# EAGLE board explorator_breakout_pcb_40mm_v2_pannel (EAGLE 9.6.2)
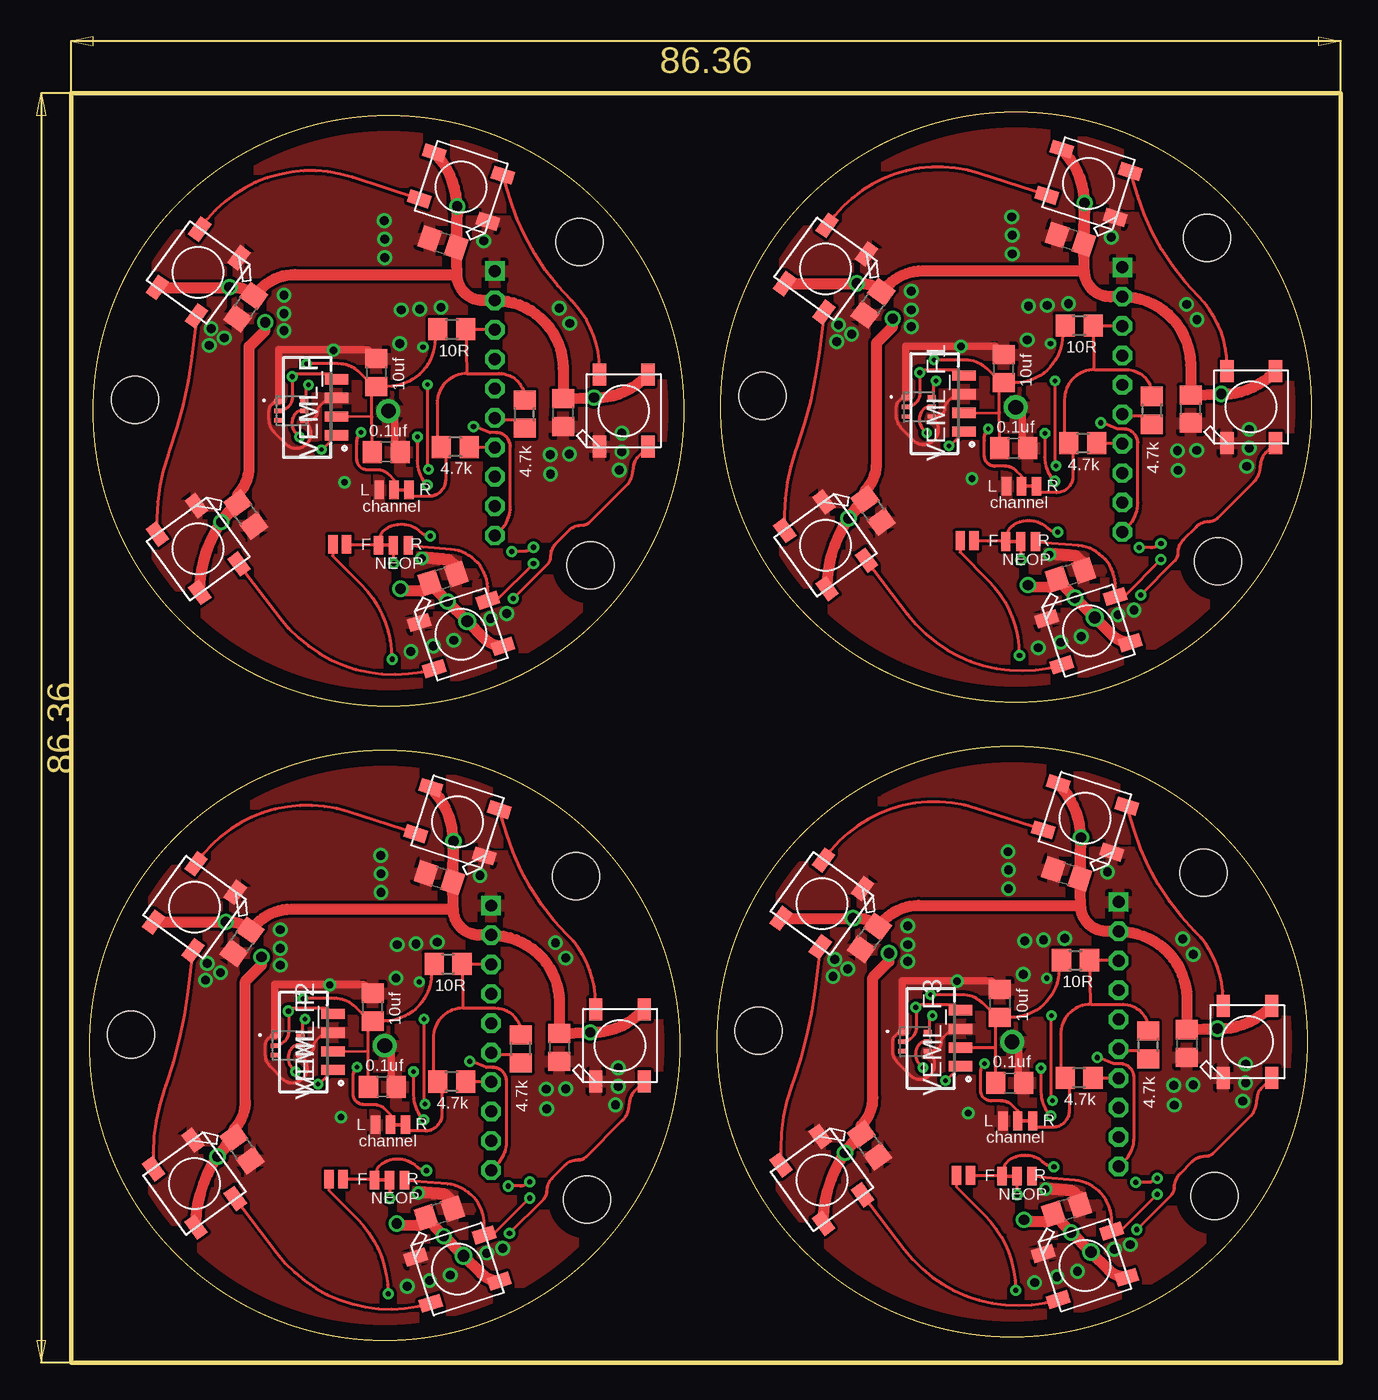
[diagram p0: board, top side]
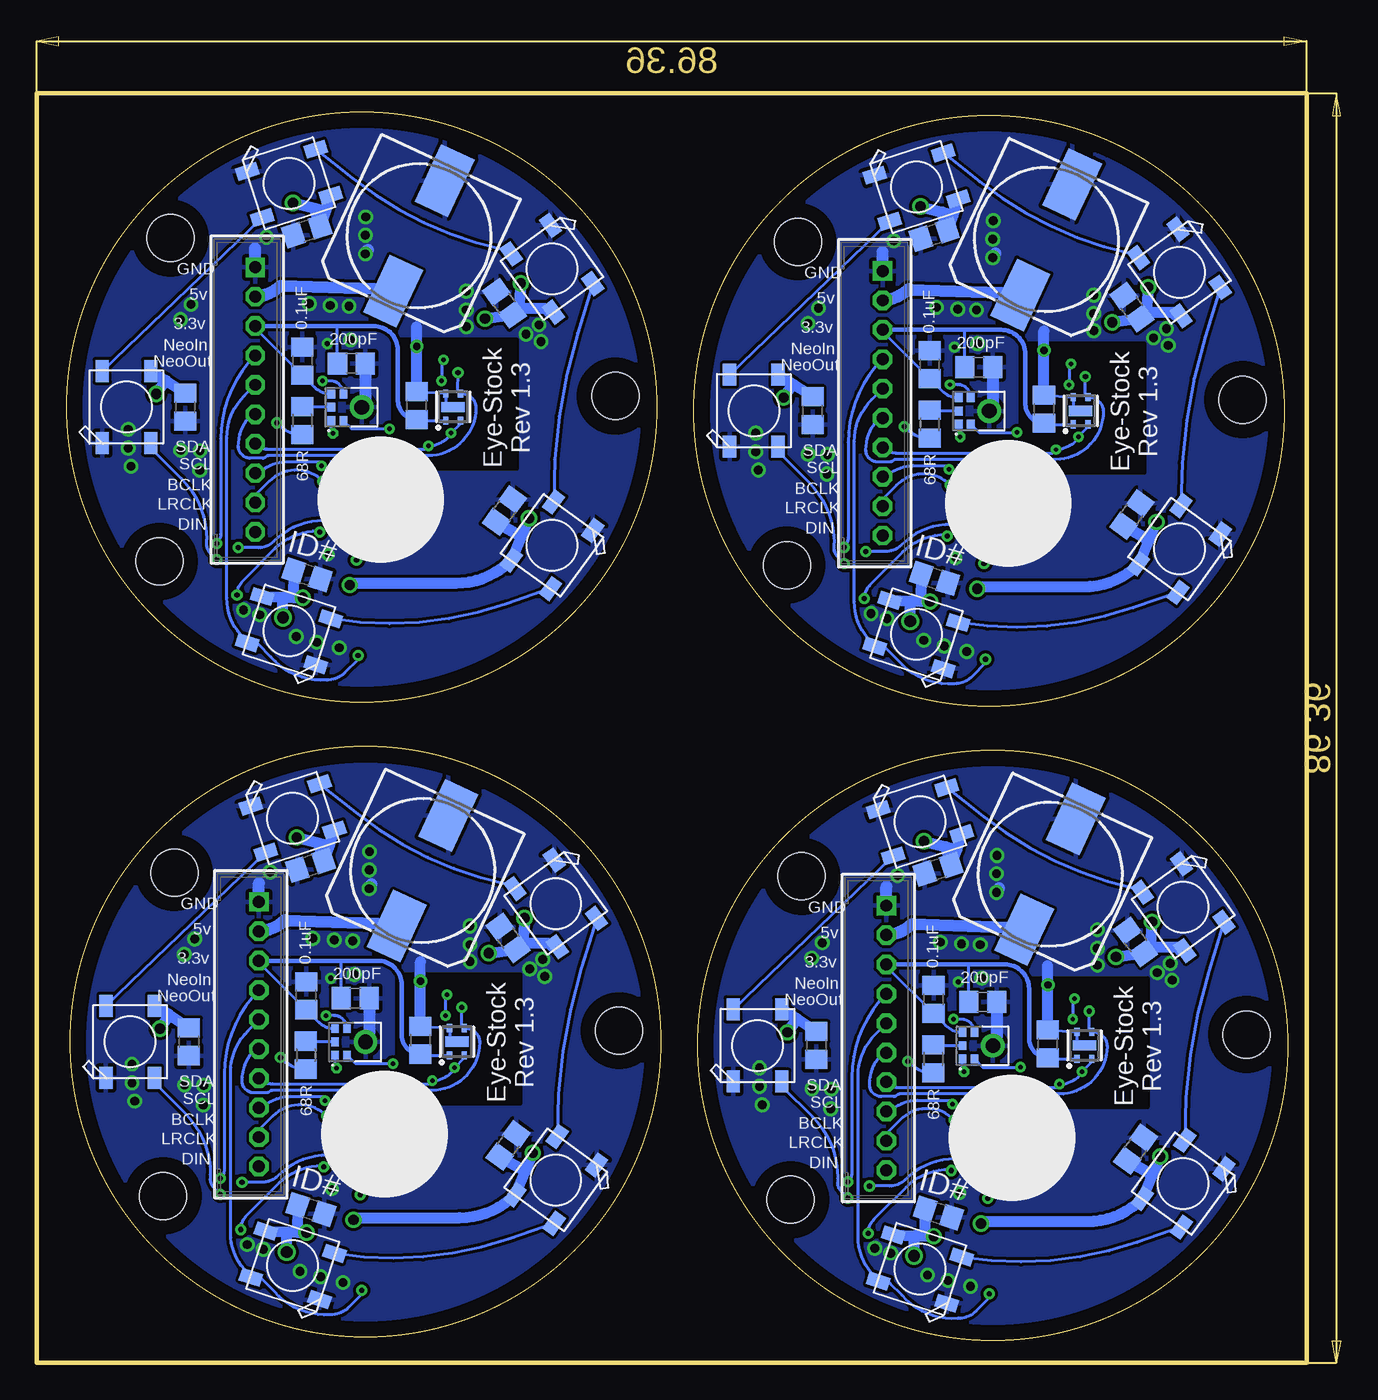
[diagram p1: board, bottom side, seen from below]

Size 86.36 x 86.36 mm. Coordinates in mm from the lower left corner, seen from the top.
Outline: 0,86.36 0,0 86.36,0 86.36,86.36 0,86.36
Outline: circle at 21.59,64.77 radius 20.07
Outline: circle at 64.26,65.02 radius 20.07
Outline: circle at 21.34,21.59 radius 20.07
Outline: circle at 64.01,21.84 radius 20.07
Copper layers (1*16): Top 0.035mm / dielectric 1.5mm / Bottom 0.035mm
Design rules "PCBway": minimum track width 6mil, minimum drill 0.3mm, track to track 0.205mm, track to pad 0.205mm, pad to pad 0.205mm, via to via 0.205mm, smd to smd 8mil, copper to edge 40mil, drill to drill 8mil, minimum pad ring 10mil, minimum via ring 8mil, stop-mask expansion 4mil, vias tented up to drill 25mil, thermal gap 10mil
Net classes: 0 default: width 0.203 mm, drill 0.254 mm, clearance 0.203 mm
Holes 3.2 mm at 35.34,54.27 4.34,65.52 34.59,76.27 78.01,54.52 47.01,65.77 77.26,76.52 35.09,11.09 4.09,22.34 34.34,33.09 77.76,11.34 46.76,22.59 77.01,33.34

## Footprints (pad centres in the part's own frame; a part is rotated, then mirrored left to right if it is on the bottom)
C0805 = smd 1.3 x 1.5: 1 -0.95,0; 2 0.95,0
153CLV-1012 = smd 4.3 x 2.5: + 4.15,0; - -4.15,0
SMT-JUMPER_3_1-NC_TRACE_NO-SILK = smd 0.635 x 1.27: 1 -1.016,0; 2 0,0; 3 1.016,0
SMT-JUMPER_2_NO_NO-SILK = smd 0.635 x 1.27: 1 -0.533,0; 2 0.406,0
MIC_SPH0645LM4H-B_LARGER_RING = smd 0.6 x 0.522: 1 -0.9,2.074; 2 -0.9,1.252; 4 0.9,1.252; 5 0.9,2.074; 6 0,2.074 | drill 1 pad 1.626: P$1 0,0
WS2812B = smd 1.5 x 0.9: 1-VDD 2.45,-1.65; 2-DOUT 2.45,1.65; 3-GND -2.45,1.65; 4-DIN -2.45,-1.65
B10B-PH-K = drill 0.813 square: 1 -9,0 | drill 0.813 octagon: 2 -7,0; 3 -5,0; 4 -3,0; 5 -1,0; 6 1,0; 7 3,0; 8 5,0; 9 7,0; 10 9,0
R0805 = smd 1.3 x 1.5: 1 -0.95,0; 2 0.95,0
SHTC3 = smd 0.55 x 0.35: 1 -0.925,0.5; 2 -0.925,-0.5; 3 0.925,-0.5; 4 0.925,0.5 | smd 0.7 x 1.6: 5 0,0
VISHAY_VEML6030_2X2X0.87 = smd 0.55 x 0.3: 1 -0.875,0.65; 2 -0.875,0; 3 -0.875,-0.65; 4 0.875,-0.65; 5 0.875,0; 6 0.875,0.65
VEML7700 = smd 0.7 x 1.6: 1 1.495,-0.4; 2 2.765,-0.4; 3 4.035,-0.4; 4 5.305,-0.4

## Placement (x,y rotation side)
C1  0.1uf  [C0805]  21.43,61.96 0 top
C2  0.1uF  [C0805]  17.86,64.87 90 bottom
C3  1mF  [153CLV-1012]  17.7,76.41 245 bottom
C4  10uf  [C0805]  20.76,67.38 90 top
C5  0.1uf  [C0805]  64.1,62.22 0 top
C6  10uf  [C0805]  63.43,67.63 90 top
C7  0.1uF  [C0805]  68.3,68.15 90 bottom
C8  0.1uF  [C0805]  25.62,67.9 90 bottom
C9  200pF  [C0805]  22.29,67.73 0 bottom
C10  200pF  [C0805]  64.96,67.99 0 bottom
C11  0.1uF  [C0805]  60.53,65.13 90 bottom
C12  1mF  [153CLV-1012]  60.38,76.66 245 bottom
C13  0.1uf  [C0805]  21.18,18.78 0 top
C14  10uf  [C0805]  20.5,24.2 90 top
C15  0.1uF  [C0805]  25.37,24.72 90 bottom
C16  200pF  [C0805]  22.03,24.55 0 bottom
C17  0.1uF  [C0805]  17.6,21.69 90 bottom
C18  1mF  [153CLV-1012]  17.45,33.23 245 bottom
C19  0.1uf  [C0805]  63.85,19.04 0 top
C20  10uf  [C0805]  63.18,24.45 90 top
C21  0.1uF  [C0805]  68.04,24.97 90 bottom
C22  200pF  [C0805]  64.7,24.81 0 bottom
C23  0.1uF  [C0805]  60.27,21.95 90 bottom
C24  1mF  [153CLV-1012]  60.12,33.48 245 bottom
JP1  JUMPER-SMT-3POS_NC_ONE  [SMT-JUMPER_3_1-NC_TRACE_NO-SILK]  21.92,55.62 180 top
JP2  JUMPER-SMT-3POS_NC_ONE  [SMT-JUMPER_3_1-NC_TRACE_NO-SILK]  64.59,55.87 180 top
JP3  JUMPER-SMT-3POS_NC_ONE  [SMT-JUMPER_3_1-NC_TRACE_NO-SILK]  21.97,59.38 0 top
JP4  JUMPER-SMT-2POS  [SMT-JUMPER_2_NO_NO-SILK]  18.34,55.68 0 top
JP5  JUMPER-SMT-3POS_NC_ONE  [SMT-JUMPER_3_1-NC_TRACE_NO-SILK]  64.65,59.64 0 top
JP6  JUMPER-SMT-2POS  [SMT-JUMPER_2_NO_NO-SILK]  61.01,55.93 0 top
JP7  JUMPER-SMT-3POS_NC_ONE  [SMT-JUMPER_3_1-NC_TRACE_NO-SILK]  21.66,12.44 180 top
JP8  JUMPER-SMT-3POS_NC_ONE  [SMT-JUMPER_3_1-NC_TRACE_NO-SILK]  21.72,16.2 0 top
JP9  JUMPER-SMT-2POS  [SMT-JUMPER_2_NO_NO-SILK]  18.08,12.5 0 top
JP10  JUMPER-SMT-3POS_NC_ONE  [SMT-JUMPER_3_1-NC_TRACE_NO-SILK]  64.33,12.69 180 top
JP11  JUMPER-SMT-3POS_NC_ONE  [SMT-JUMPER_3_1-NC_TRACE_NO-SILK]  64.39,16.46 0 top
JP12  JUMPER-SMT-2POS  [SMT-JUMPER_2_NO_NO-SILK]  60.76,12.75 0 top
MK_REAR  SPH-IMPROVED  [MIC_SPH0645LM4H-B_LARGER_RING]  21.58,64.75 90 bottom
MK_REAR1  SPH-IMPROVED  [MIC_SPH0645LM4H-B_LARGER_RING]  64.25,65.01 90 bottom
MK_REAR2  SPH-IMPROVED  [MIC_SPH0645LM4H-B_LARGER_RING]  21.33,21.57 90 bottom
MK_REAR3  SPH-IMPROVED  [MIC_SPH0645LM4H-B_LARGER_RING]  64,21.83 90 bottom
NC1  0.1uf  [C0805]  33.47,64.64 270 top
NC2  0.1uf  [C0805]  25.3,76.18 162 top
NC3  0.1uf  [C0805]  11.88,71.82 234 top
NC4  0.1uf  [C0805]  11.88,57.72 306 top
NC5  0.1uf  [C0805]  25.3,53.36 18 top
NC6  0.1uf  [C0805]  33.59,64.77 270 bottom
NC7  0.1uf  [C0805]  25.32,76.77 198 bottom
NC8  0.1uf  [C0805]  11.88,71.82 126 bottom
NC9  0.1uf  [C0805]  11.88,57.72 54 bottom
NC10  0.1uf  [C0805]  25.3,53.36 342 bottom
NC11  0.1uf  [C0805]  76.14,64.9 270 top
NC12  0.1uf  [C0805]  67.97,76.44 162 top
NC13  0.1uf  [C0805]  54.55,72.08 234 top
NC14  0.1uf  [C0805]  54.55,57.97 306 top
NC15  0.1uf  [C0805]  67.97,53.61 18 top
NC16  0.1uf  [C0805]  76.26,65.02 270 bottom
NC17  0.1uf  [C0805]  68,77.02 198 bottom
NC18  0.1uf  [C0805]  54.55,72.08 126 bottom
NC19  0.1uf  [C0805]  54.55,57.97 54 bottom
NC20  0.1uf  [C0805]  67.97,53.61 342 bottom
NC21  0.1uf  [C0805]  33.21,21.46 270 top
NC22  0.1uf  [C0805]  25.04,33 162 top
NC23  0.1uf  [C0805]  11.63,28.64 234 top
NC24  0.1uf  [C0805]  11.63,14.54 306 top
NC25  0.1uf  [C0805]  25.04,10.18 18 top
NC26  0.1uf  [C0805]  33.34,21.59 270 bottom
NC27  0.1uf  [C0805]  25.07,33.59 198 bottom
NC28  0.1uf  [C0805]  11.63,28.64 126 bottom
NC29  0.1uf  [C0805]  11.63,14.54 54 bottom
NC30  0.1uf  [C0805]  25.04,10.18 342 bottom
NC31  0.1uf  [C0805]  75.88,21.72 270 top
NC32  0.1uf  [C0805]  67.72,33.26 162 top
NC33  0.1uf  [C0805]  54.3,28.9 234 top
NC34  0.1uf  [C0805]  54.3,14.79 306 top
NC35  0.1uf  [C0805]  67.72,10.43 18 top
NC36  0.1uf  [C0805]  76.01,21.84 270 bottom
NC37  0.1uf  [C0805]  67.74,33.84 198 bottom
NC38  0.1uf  [C0805]  54.3,28.9 126 bottom
NC39  0.1uf  [C0805]  54.3,14.79 54 bottom
NC40  0.1uf  [C0805]  67.72,10.43 342 bottom
NEO_01  WS2812  [WS2812B]  37.59,64.77 90 top
NEO_02  WS2812  [WS2812B]  26.53,79.99 162 top
NEO_03  WS2812  [WS2812B]  8.65,74.17 234 top
NEO_04  WS2812  [WS2812B]  8.65,55.37 306 top
NEO_05  WS2812  [WS2812B]  26.53,49.55 18 top
NEO_06  WS2812  [WS2812B]  37.59,64.77 90 bottom
NEO_07  WS2812  [WS2812B]  26.53,79.99 18 bottom
NEO_08  WS2812  [WS2812B]  8.65,74.17 306 bottom
NEO_09  WS2812  [WS2812B]  8.65,55.37 234 bottom
NEO_10  WS2812  [WS2812B]  26.53,49.55 162 bottom
NEO_11  WS2812  [WS2812B]  51.32,55.62 306 top
NEO_12  WS2812  [WS2812B]  69.21,49.81 18 top
NEO_13  WS2812  [WS2812B]  80.26,65.02 90 top
NEO_14  WS2812  [WS2812B]  69.21,80.24 162 top
NEO_15  WS2812  [WS2812B]  51.32,74.43 234 top
NEO_16  WS2812  [WS2812B]  51.32,55.62 234 bottom
NEO_17  WS2812  [WS2812B]  69.21,49.81 162 bottom
NEO_18  WS2812  [WS2812B]  80.26,65.02 90 bottom
NEO_19  WS2812  [WS2812B]  69.21,80.24 18 bottom
NEO_20  WS2812  [WS2812B]  51.32,74.43 306 bottom
NEO_21  WS2812  [WS2812B]  8.39,12.19 306 top
NEO_22  WS2812  [WS2812B]  26.28,6.37 18 top
NEO_23  WS2812  [WS2812B]  37.34,21.59 90 top
NEO_24  WS2812  [WS2812B]  26.28,36.81 162 top
NEO_25  WS2812  [WS2812B]  8.39,30.99 234 top
NEO_26  WS2812  [WS2812B]  8.39,12.19 234 bottom
NEO_27  WS2812  [WS2812B]  26.28,6.37 162 bottom
NEO_28  WS2812  [WS2812B]  37.34,21.59 90 bottom
NEO_29  WS2812  [WS2812B]  26.28,36.81 18 bottom
NEO_30  WS2812  [WS2812B]  8.39,30.99 306 bottom
NEO_31  WS2812  [WS2812B]  51.06,12.44 306 top
NEO_32  WS2812  [WS2812B]  68.95,6.63 18 top
NEO_33  WS2812  [WS2812B]  80.01,21.84 90 top
NEO_34  WS2812  [WS2812B]  68.95,37.06 162 top
NEO_35  WS2812  [WS2812B]  51.06,31.25 234 top
NEO_36  WS2812  [WS2812B]  51.06,12.44 234 bottom
NEO_37  WS2812  [WS2812B]  68.95,6.63 162 bottom
NEO_38  WS2812  [WS2812B]  80.01,21.84 90 bottom
NEO_39  WS2812  [WS2812B]  68.95,37.06 18 bottom
NEO_40  WS2812  [WS2812B]  51.06,31.25 306 bottom
P1  B10B-PH-K  [B10B-PH-K]  28.83,65.28 270 bottom
P2  B10B-PH-K  [B10B-PH-K]  71.5,65.53 270 bottom
P3  B10B-PH-K  [B10B-PH-K]  28.57,22.1 270 bottom
P4  B10B-PH-K  [B10B-PH-K]  71.25,22.35 270 bottom
R1  10R  [R0805]  68.57,70.57 0 top
R2  4.7k  [R0805]  73.51,64.8 90 top
R3  10R  [R0805]  25.9,70.32 0 top
R4  4.7k  [R0805]  68.81,62.56 180 top
R5  4.7k  [R0805]  26.14,62.31 180 top
R6  4.7k  [R0805]  30.84,64.54 90 top
R7  68R  [R0805]  68.31,64.11 270 bottom
R8  10R  [R0805]  25.64,27.14 0 top
R9  4.7k  [R0805]  30.59,21.36 90 top
R10  4.7k  [R0805]  25.88,19.13 180 top
R11  68R  [R0805]  25.38,20.68 270 bottom
R12  10R  [R0805]  68.31,27.39 0 top
R13  4.7k  [R0805]  73.26,21.62 90 top
R14  4.7k  [R0805]  68.56,19.38 180 top
R15  68R  [R0805]  25.64,63.86 270 bottom
R16  68R  [R0805]  68.06,20.93 270 bottom
U1  SHTC3  [SHTC3]  15.37,64.77 90 bottom
U2  VEML6030-GS15  [VISHAY_VEML6030_2X2X0.87]  14.99,64.77 0 top
U3  SHTC3  [SHTC3]  58.04,65.02 90 bottom
U4  VEML6030-GS15  [VISHAY_VEML6030_2X2X0.87]  57.66,65.02 0 top
U5  SHTC3  [SHTC3]  15.11,21.59 90 bottom
U6  VEML6030-GS15  [VISHAY_VEML6030_2X2X0.87]  14.73,21.59 0 top
U7  SHTC3  [SHTC3]  57.78,21.84 90 bottom
U8  VEML6030-GS15  [VISHAY_VEML6030_2X2X0.87]  57.4,21.84 0 top
VEML_F  VEML7700-TT  [VEML7700]  17.66,61.61 90 top
VEML_F1  VEML7700-TT  [VEML7700]  60.34,61.86 90 top
VEML_F2  VEML7700-TT  [VEML7700]  17.41,18.43 90 top
VEML_F3  VEML7700-TT  [VEML7700]  60.08,18.68 90 top

## Library data of the parts
C1-C24 NC1-NC40 = rcl; SPICEPREFIX: C
JP1-JP12 = nathans-custom-parts
MK_REAR MK_REAR1-MK_REAR3 = SPH0645LM4H-B
NEO_01-NEO_09 NEO_10-NEO_40 = WS2812B
P1-P4 = con-jst-ph
R1-R16 = PulseOximeterECG_AU; SPICEPREFIX: R
U1 U3 U5 U7 = SHTC3
U2 U4 U6 U8 = VEML6030-GS15; AVAILABILITY: Unavailable; DESCRIPTION: Optical Sensor Ambient 550nm I²C 6-SMD, No Lead; MF: Vishay Semiconductor; MP: VEML6030-GS15; PACKAGE: SMD-6 Vishay; PRICE: None
VEML_F VEML_F1-VEML_F3 = VEML7700-TT; DESCRIPTION: 16Bit Ambient Light Sensor I2C 6.8x2.3mm; HEIGHT: mm; MANUFACTURER_NAME: Vishay; MANUFACTURER_PART_NUMBER: VEML7700-TT; MOUSER_PART_NUMBER: 78-VEML7700-TT; MOUSER_PRICE-STOCK: https://www.mouser.com/Search/Refine.aspx?Keyword=78-VEML7700-TT; RS_PART_NUMBER: 1226791P; RS_PRICE-STOCK: http://uk.rs-online.com/web/p/products/1226791P

## Nets
3.3V: C2.1 C8.1 C9.1 JP3.3 MK_REAR.5 P1.3 R3.2 R5.2 R6.2 U1.1
3.3V1: C7.1 C10.1 C11.1 JP5.3 MK_REAR1.5 P2.3 R1.2 R2.2 R4.2 U3.1
3.3V2: C15.1 C16.1 C17.1 JP8.3 MK_REAR2.5 P3.3 R8.2 R9.2 R10.2 U5.1
3.3V3: C21.1 C22.1 C23.1 JP11.3 MK_REAR3.5 P4.3 R12.2 R13.2 R14.2 U7.1
5V: C3.+ NC1.1 NC2.1 NC3.1 NC4.1 NC5.1 NC6.1 NC7.1 NC8.1 NC9.1 NC10.1 NEO_01.1-VDD NEO_02.1-VDD NEO_03.1-VDD NEO_04.1-VDD NEO_05.1-VDD NEO_06.1-VDD NEO_07.1-VDD NEO_08.1-VDD NEO_09.1-VDD NEO_10.1-VDD P1.2
5V1: C12.+ NC11.1 NC12.1 NC13.1 NC14.1 NC15.1 NC16.1 NC17.1 NC18.1 NC19.1 NC20.1 NEO_11.1-VDD NEO_12.1-VDD NEO_13.1-VDD NEO_14.1-VDD NEO_15.1-VDD NEO_16.1-VDD NEO_17.1-VDD NEO_18.1-VDD NEO_19.1-VDD NEO_20.1-VDD P2.2
5V2: C18.+ NC21.1 NC22.1 NC23.1 NC24.1 NC25.1 NC26.1 NC27.1 NC28.1 NC29.1 NC30.1 NEO_21.1-VDD NEO_22.1-VDD NEO_23.1-VDD NEO_24.1-VDD NEO_25.1-VDD NEO_26.1-VDD NEO_27.1-VDD NEO_28.1-VDD NEO_29.1-VDD NEO_30.1-VDD P3.2
5V3: C24.+ NC31.1 NC32.1 NC33.1 NC34.1 NC35.1 NC36.1 NC37.1 NC38.1 NC39.1 NC40.1 NEO_31.1-VDD NEO_32.1-VDD NEO_33.1-VDD NEO_34.1-VDD NEO_35.1-VDD NEO_36.1-VDD NEO_37.1-VDD NEO_38.1-VDD NEO_39.1-VDD NEO_40.1-VDD P4.2
BCLK: MK_REAR.4 P1.8
BCLK1: MK_REAR1.4 P2.8
BCLK2: MK_REAR2.4 P3.8
BCLK3: MK_REAR3.4 P4.8
DIN: P1.10 R15.2
DIN1: P2.10 R7.2
DIN2: P3.10 R11.2
DIN3: P4.10 R16.2
GND: C1.2 C2.2 C3.- C4.2 C8.2 C9.2 JP3.1 MK_REAR.P$1 NC1.2 NC2.2 NC3.2 NC4.2 NC5.2 NC6.2 NC7.2 NC8.2 NC9.2 NC10.2 NEO_01.3-GND NEO_02.3-GND NEO_03.3-GND NEO_04.3-GND NEO_05.3-GND NEO_06.3-GND NEO_07.3-GND NEO_08.3-GND NEO_09.3-GND NEO_10.3-GND P1.1 U1.4 U1.5 U2.1 U2.4 VEML_F.3
GND1: C5.2 C6.2 C7.2 C10.2 C11.2 C12.- JP5.1 MK_REAR1.P$1 NC11.2 NC12.2 NC13.2 NC14.2 NC15.2 NC16.2 NC17.2 NC18.2 NC19.2 NC20.2 NEO_11.3-GND NEO_12.3-GND NEO_13.3-GND NEO_14.3-GND NEO_15.3-GND NEO_16.3-GND NEO_17.3-GND NEO_18.3-GND NEO_19.3-GND NEO_20.3-GND P2.1 U3.4 U3.5 U4.1 U4.4 VEML_F1.3
GND2: C13.2 C14.2 C15.2 C16.2 C17.2 C18.- JP8.1 MK_REAR2.P$1 NC21.2 NC22.2 NC23.2 NC24.2 NC25.2 NC26.2 NC27.2 NC28.2 NC29.2 NC30.2 NEO_21.3-GND NEO_22.3-GND NEO_23.3-GND NEO_24.3-GND NEO_25.3-GND NEO_26.3-GND NEO_27.3-GND NEO_28.3-GND NEO_29.3-GND NEO_30.3-GND P3.1 U5.4 U5.5 U6.1 U6.4 VEML_F2.3
GND3: C19.2 C20.2 C21.2 C22.2 C23.2 C24.- JP11.1 MK_REAR3.P$1 NC31.2 NC32.2 NC33.2 NC34.2 NC35.2 NC36.2 NC37.2 NC38.2 NC39.2 NC40.2 NEO_31.3-GND NEO_32.3-GND NEO_33.3-GND NEO_34.3-GND NEO_35.3-GND NEO_36.3-GND NEO_37.3-GND NEO_38.3-GND NEO_39.3-GND NEO_40.3-GND P4.1 U7.4 U7.5 U8.1 U8.4 VEML_F3.3
LRCLK: MK_REAR.1 P1.9
LRCLK1: MK_REAR1.1 P2.9
LRCLK2: MK_REAR2.1 P3.9
LRCLK3: MK_REAR3.1 P4.9
N$1: C1.1 C4.1 R3.1 U2.6 VEML_F.2
N$2: JP1.1 NEO_05.2-DOUT NEO_06.4-DIN
N$3: NEO_11.2-DOUT NEO_12.4-DIN
N$4: NEO_02.2-DOUT NEO_03.4-DIN
N$5: NEO_09.2-DOUT NEO_10.4-DIN
N$6: JP3.2 MK_REAR.2
N$7: NEO_07.2-DOUT NEO_08.4-DIN
N$8: NEO_04.2-DOUT NEO_05.4-DIN
N$9: NEO_08.2-DOUT NEO_09.4-DIN
N$10: NEO_03.2-DOUT NEO_04.4-DIN
N$11: NEO_14.2-DOUT NEO_15.4-DIN
N$12: C5.1 C6.1 R1.1 U4.6 VEML_F1.2
N$13: NEO_11.4-DIN NEO_15.2-DOUT
N$14: MK_REAR1.6 R7.1
N$15: JP5.2 MK_REAR1.2
N$16: NEO_16.2-DOUT NEO_17.4-DIN
N$17: MK_REAR.6 R15.1
N$18: NEO_19.2-DOUT NEO_20.4-DIN
N$19: NEO_16.4-DIN NEO_20.2-DOUT
N$20: JP2.1 NEO_12.2-DOUT NEO_18.4-DIN
N$21: NEO_21.2-DOUT NEO_22.4-DIN
N$22: NEO_24.2-DOUT NEO_25.4-DIN
N$23: C13.1 C14.1 R8.1 U6.6 VEML_F2.2
N$24: NEO_21.4-DIN NEO_25.2-DOUT
N$25: MK_REAR2.6 R11.1
N$26: JP8.2 MK_REAR2.2
N$27: NEO_26.2-DOUT NEO_27.4-DIN
N$28: NEO_29.2-DOUT NEO_30.4-DIN
N$29: NEO_26.4-DIN NEO_30.2-DOUT
N$30: JP7.1 NEO_22.2-DOUT NEO_28.4-DIN
N$31: NEO_31.2-DOUT NEO_32.4-DIN
N$32: NEO_34.2-DOUT NEO_35.4-DIN
N$33: C19.1 C20.1 R12.1 U8.6 VEML_F3.2
N$34: NEO_31.4-DIN NEO_35.2-DOUT
N$35: MK_REAR3.6 R16.1
N$36: JP11.2 MK_REAR3.2
N$37: NEO_36.2-DOUT NEO_37.4-DIN
N$38: NEO_39.2-DOUT NEO_40.4-DIN
N$39: NEO_36.4-DIN NEO_40.2-DOUT
N$40: JP10.1 NEO_32.2-DOUT NEO_38.4-DIN
NEO_P1: NEO_01.2-DOUT NEO_02.4-DIN
NEO_P2: NEO_06.2-DOUT NEO_07.4-DIN
NEO_P3: NEO_13.2-DOUT NEO_14.4-DIN
NEO_P4: NEO_18.2-DOUT NEO_19.4-DIN
NEO_P5: NEO_23.2-DOUT NEO_24.4-DIN
NEO_P6: NEO_28.2-DOUT NEO_29.4-DIN
NEO_P7: NEO_33.2-DOUT NEO_34.4-DIN
NEO_P8: NEO_38.2-DOUT NEO_39.4-DIN
NEOP_IN: JP1.3 JP4.2 NEO_01.4-DIN
NEOP_IN1: JP2.3 JP6.2 NEO_13.4-DIN
NEOP_IN2: JP7.3 JP9.2 NEO_23.4-DIN
NEOP_IN3: JP10.3 JP12.2 NEO_33.4-DIN
NEOP_OUT: JP4.1 NEO_10.2-DOUT P1.5
NEOP_OUT1: JP6.1 NEO_17.2-DOUT P2.5
NEOP_OUT2: JP9.1 NEO_27.2-DOUT P3.5
NEOP_OUT3: JP12.1 NEO_37.2-DOUT P4.5
NIN: JP1.2 P1.4
NIN1: JP2.2 P2.4
NIN2: JP7.2 P3.4
NIN3: JP10.2 P4.4
SCL0: P1.7 R5.1 U1.2 U2.5 VEML_F.1
SCL1: P2.7 R4.1 U3.2 U4.5 VEML_F1.1
SCL2: P3.7 R10.1 U5.2 U6.5 VEML_F2.1
SCL3: P4.7 R14.1 U7.2 U8.5 VEML_F3.1
SDA0: P1.6 R6.1 U1.3 U2.2 VEML_F.4
SDA1: P2.6 R2.1 U3.3 U4.2 VEML_F1.4
SDA2: P3.6 R9.1 U5.3 U6.2 VEML_F2.4
SDA3: P4.6 R13.1 U7.3 U8.2 VEML_F3.4

## Tracks (layer width: path | path; a pad name or v marks a point on that pad's centre or on a via)
3.3V
  Top 0.203: P1.3 28.79,70.32 R3.2 26.9,67.34 26.92,67.31 | 24.92,62.09 24.89,62.06 24.89,65.28 arc-90 26.92,67.31 | 24.92,62.09 25.47,62.64 25.47,60.07 arc-90 24.35,58.95 23.22,58.95 JP3.3 | 24.92,62.09 R5.2 | 26.92,67.31 29.11,67.31 arc-90 30.86,65.56 R6.2
  Bottom 0.203: MK_REAR.5 arc45 24.8,66.13 C8.1 28.83,70.15 P1.3 | C9.1 | C9.1 23.24,70.28 | C2.1 17.63,63.84 U1.1
  Bottom 0.305: C2.1 arc90 19.13,65.3 19.13,68.63 arc-90 20.77,70.28 23.24,70.28 P1.3
3.3V1
  Top 0.203: P2.3 71.46,70.57 R1.2 69.57,67.59 69.6,67.56 | 67.59,62.34 67.56,62.32 67.56,65.53 arc-90 69.6,67.56 | 67.59,62.34 68.14,62.89 68.14,60.32 arc-90 67.02,59.2 65.89,59.2 JP5.3 | 67.59,62.34 R4.2 | 69.6,67.56 71.79,67.56 arc-90 73.53,65.82 R2.2
  Bottom 0.203: MK_REAR1.5 arc45 67.48,66.38 C7.1 71.5,70.41 P2.3 | C10.1 | C10.1 65.91,70.53 | C11.1 60.3,64.1 U3.1
  Bottom 0.305: C11.1 arc90 61.8,65.56 61.8,68.89 arc-90 63.44,70.53 65.91,70.53 P2.3
3.3V2
  Top 0.203: P3.3 28.54,27.14 R8.2 26.64,24.16 26.67,24.13 | 24.66,18.91 24.64,18.88 24.64,22.1 arc-90 26.67,24.13 | 24.66,18.91 25.21,19.46 25.21,16.89 arc-90 24.09,15.77 22.97,15.77 JP8.3 | 24.66,18.91 R10.2 | 26.67,24.13 28.86,24.13 arc-90 30.61,22.38 R9.2
  Bottom 0.203: MK_REAR2.5 arc45 24.55,22.95 C15.1 28.57,26.97 P3.3 | C16.1 | C16.1 22.98,27.1 | C17.1 17.37,20.66 U5.1
  Bottom 0.305: C17.1 arc90 18.87,22.12 18.87,25.45 arc-90 20.52,27.1 22.98,27.1 P3.3
3.3V3
  Top 0.203: P4.3 71.21,27.39 R12.2 69.31,24.41 69.34,24.38 | 67.33,19.16 67.31,19.14 67.31,22.35 arc-90 69.34,24.38 | 67.33,19.16 67.89,19.71 67.89,17.14 arc-90 66.77,16.02 65.64,16.02 JP11.3 | 67.33,19.16 R14.2 | 69.34,24.38 71.53,24.38 arc-90 73.28,22.64 R13.2
  Bottom 0.203: MK_REAR3.5 arc45 67.22,23.2 C21.1 71.25,27.23 P4.3 | C22.1 | C22.1 65.65,27.35 | C23.1 60.04,20.92 U7.1
  Bottom 0.305: C23.1 arc90 61.54,22.38 61.54,25.71 arc-90 63.19,27.35 65.65,27.35 P4.3
5V  (via drill 0.7, 0.8)
  Top 0.762: 26.25,74.04 arc90 28.01,72.28 P1.2 arc-90 33.47,67.64 NC1.1 | 26.25,74.04 NC2.1 | NEO_02.1-VDD arc-45 26.25,78.61 NC2.1 | 26.25,74.04 15.23,74.04 arc45 12.92,73.08 NC3.1 arc45 11.19,73.16 10.74,73.16 | NEO_03.1-VDD 10.74,73.16 | NEO_04.1-VDD arc-45 11.28,58.51 NC4.1 | NC4.1 11.32,59.05 arc45 12.12,60.96 12.12,69.14 13.21,70.23 v13.21,70.79 | NEO_05.1-VDD arc-45 28.15,49.25 v26.95,50.45 25.59,51.8 | 25.59,51.8 NC5.1 | NC1.1 35.59,65.64 arc45 39.13,67.11 NEO_01.1-VDD | v10.77,73.18 10.74,73.16 | v25.6,51.79 25.59,51.8 | NC1.1 v35.56,65.66 | v10.21,57.2 NC4.1 | v26.26,78.66 NC2.1 | NC5.1 24,52.67 | v22.4,52.65 22.54,52.52 23.83,52.5 NC5.1
  Bottom 0.762: v10.21,57.2 10.73,55.97 | 10.73,55.97 NEO_09.1-VDD arc45 15.18,52.79 22.26,52.79 v22.4,52.65 | NC9.1 10.73,55.97 | NEO_10.1-VDD 26.89,51.83 | 26.89,51.83 26.24,51.81 | 26.24,51.81 v25.6,51.79 | NC10.1 26.24,51.81 | NEO_06.1-VDD 34.9,66.58 | 34.9,66.58 NC6.1 | v35.56,65.66 34.9,66.58 | NEO_07.1-VDD 24.04,78.1 | 24.04,78.1 NC7.1 24.77,78.28 | v26.26,78.66 24.77,78.28 | 24.77,78.28 24.04,78.1 | NEO_08.1-VDD 8.85,71.22 9.07,71.45 10.89,71.45 | 10.89,71.45 10.9,71.45 NC8.1 v13.21,70.79 | v10.77,73.18 10.89,71.45 | v26.95,50.45 26.95,51.77 26.89,51.83
  Bottom 0.813: P1.2 arc-39 27.1,73.02 19.59,72.78 C3.+
5V1  (via drill 0.7, 0.8)
  Top 0.762: 68.92,74.3 arc90 70.68,72.53 P2.2 arc-90 76.14,67.89 NC11.1 | 68.92,74.3 NC12.1 | NEO_14.1-VDD arc-45 68.92,78.86 NC12.1 | 68.92,74.3 57.91,74.3 arc45 55.59,73.34 NC13.1 arc45 53.86,73.42 53.42,73.42 | NEO_15.1-VDD 53.42,73.42 | NEO_11.1-VDD arc-45 53.95,58.76 NC14.1 | NC14.1 54,59.3 arc45 54.79,61.22 54.79,69.39 55.88,70.48 v55.88,71.04 | NEO_12.1-VDD arc-45 70.82,49.5 v69.62,50.7 68.26,52.06 | 68.26,52.06 NC15.1 | NC11.1 78.26,65.9 arc45 81.8,67.36 NEO_13.1-VDD | v53.44,73.43 53.42,73.42 | v68.28,52.04 68.26,52.06 | NC11.1 v78.23,65.91 | v52.88,57.45 NC14.1 | v68.94,78.92 NC12.1 | NC15.1 66.67,52.92 | v65.08,52.91 65.21,52.77 66.5,52.75 NC15.1
  Bottom 0.762: v52.88,57.45 53.41,56.23 | 53.41,56.23 NEO_16.1-VDD arc45 57.86,53.05 64.94,53.05 v65.08,52.91 | NC19.1 53.41,56.23 | NEO_17.1-VDD 69.56,52.09 | 69.56,52.09 68.91,52.06 | 68.91,52.06 v68.28,52.04 | NC20.1 68.91,52.06 | NEO_18.1-VDD 77.57,66.83 | 77.57,66.83 NC16.1 | v78.23,65.91 77.57,66.83 | NEO_19.1-VDD 66.72,78.35 | 66.72,78.35 NC17.1 67.44,78.54 | v68.94,78.92 67.44,78.54 | 67.44,78.54 66.72,78.35 | NEO_20.1-VDD 51.52,71.48 51.75,71.7 53.57,71.7 | 53.57,71.7 NC18.1 v55.88,71.04 | v53.44,73.43 53.57,71.7 | v69.62,50.7 69.62,52.03 69.56,52.09
  Bottom 0.813: P2.2 arc-39 69.77,73.28 62.26,73.03 C12.+
5V2  (via drill 0.7, 0.8)
  Top 0.762: 26,30.86 arc90 27.76,29.1 P3.2 arc-90 33.21,24.46 NC21.1 | 26,30.86 NC22.1 | NEO_24.1-VDD arc-45 26,35.43 NC22.1 | 26,30.86 14.98,30.86 arc45 12.66,29.9 NC23.1 arc45 10.94,29.98 10.49,29.98 | NEO_25.1-VDD 10.49,29.98 | NEO_21.1-VDD arc-45 11.02,15.33 NC24.1 | NC24.1 11.07,15.87 arc45 11.86,17.78 11.86,25.96 12.95,27.05 v12.95,27.61 | NEO_22.1-VDD arc-45 27.89,6.07 v26.69,7.27 25.34,8.62 | 25.34,8.62 NC25.1 | NC21.1 35.34,22.46 arc45 38.88,23.93 NEO_23.1-VDD | v10.52,30 10.49,29.98 | v25.35,8.61 25.34,8.62 | NC21.1 v35.31,22.48 | v9.96,14.02 NC24.1 | v26.01,35.48 NC22.1 | NC25.1 23.75,9.49 | v22.15,9.47 22.29,9.34 23.58,9.32 NC25.1
  Bottom 0.762: v9.96,14.02 10.48,12.79 | 10.48,12.79 NEO_26.1-VDD arc45 14.93,9.61 22.01,9.61 v22.15,9.47 | NC29.1 10.48,12.79 | NEO_27.1-VDD 26.63,8.65 | 26.63,8.65 25.98,8.63 | 25.98,8.63 v25.35,8.61 | NC30.1 25.98,8.63 | NEO_28.1-VDD 34.65,23.4 | 34.65,23.4 NC26.1 | v35.31,22.48 34.65,23.4 | NEO_29.1-VDD 23.79,34.92 | 23.79,34.92 NC27.1 24.52,35.1 | v26.01,35.48 24.52,35.1 | 24.52,35.1 23.79,34.92 | NEO_30.1-VDD 8.6,28.04 8.82,28.27 10.64,28.27 | 10.64,28.27 NC28.1 v12.95,27.61 | v10.52,30 10.64,28.27 | v26.69,7.27 26.69,8.59 26.63,8.65
  Bottom 0.813: P3.2 arc-39 26.85,29.84 19.34,29.6 C18.+
5V3  (via drill 0.7, 0.8)
  Top 0.762: 68.67,31.11 arc90 70.43,29.35 P4.2 arc-90 75.88,24.71 NC31.1 | 68.67,31.11 NC32.1 | NEO_34.1-VDD arc-45 68.67,35.68 NC32.1 | 68.67,31.11 57.65,31.11 arc45 55.34,30.16 NC33.1 arc45 53.61,30.24 53.16,30.24 | NEO_35.1-VDD 53.16,30.24 | NEO_31.1-VDD arc-45 53.69,15.58 NC34.1 | NC34.1 53.74,16.12 arc45 54.53,18.04 54.53,26.21 55.63,27.3 v55.63,27.86 | NEO_32.1-VDD arc-45 70.56,6.32 v69.36,7.52 68.01,8.88 | 68.01,8.88 NC35.1 | NC31.1 78.01,22.72 arc45 81.55,24.18 NEO_33.1-VDD | v53.19,30.25 53.16,30.24 | v68.02,8.86 68.01,8.88 | NC31.1 v77.98,22.73 | v52.63,14.27 NC34.1 | v68.68,35.74 NC32.1 | NC35.1 66.42,9.74 | v64.82,9.73 64.96,9.59 66.25,9.57 NC35.1
  Bottom 0.762: v52.63,14.27 53.15,13.05 | 53.15,13.05 NEO_36.1-VDD arc45 57.6,9.87 64.68,9.87 v64.82,9.73 | NC39.1 53.15,13.05 | NEO_37.1-VDD 69.31,8.91 | 69.31,8.91 68.66,8.88 | 68.66,8.88 v68.02,8.86 | NC40.1 68.66,8.88 | NEO_38.1-VDD 77.32,23.65 | 77.32,23.65 NC36.1 | v77.98,22.73 77.32,23.65 | NEO_39.1-VDD 66.46,35.17 | 66.46,35.17 NC37.1 67.19,35.36 | v68.68,35.74 67.19,35.36 | 67.19,35.36 66.46,35.17 | NEO_40.1-VDD 51.27,28.3 51.49,28.52 53.31,28.52 | 53.31,28.52 NC38.1 v55.63,27.86 | v53.19,30.25 53.31,28.52 | v69.36,7.52 69.36,8.85 69.31,8.91
  Bottom 0.813: P4.2 arc-39 69.52,30.1 62.01,29.85 C24.+
BCLK  (via drill 0.3)
  Top 0.203: v24.26,66.55 24.23,66.52 24.23,60.98 24.23,60.87 v24.32,60.77
  Bottom 0.203: MK_REAR.4 arc-90 23.73,66.55 v24.26,66.55 | P1.8 28.58,60.28 arc45 26.73,61.04 24.33,61.04 24.32,61.04 v24.32,60.77
BCLK1  (via drill 0.3)
  Top 0.203: v66.93,66.8 66.9,66.77 66.9,61.23 66.9,61.12 v67,61.03
  Bottom 0.203: MK_REAR1.4 arc-90 66.4,66.8 v66.93,66.8 | P2.8 71.25,60.53 arc45 69.4,61.3 67,61.3 67,61.29 v67,61.03
BCLK2  (via drill 0.3)
  Top 0.203: v24,23.37 23.97,23.34 23.97,17.8 23.97,17.69 v24.07,17.59
  Bottom 0.203: MK_REAR2.4 arc-90 23.48,23.37 v24,23.37 | P3.8 28.32,17.1 arc45 26.48,17.86 24.07,17.86 v24.07,17.59
BCLK3  (via drill 0.3)
  Top 0.203: v66.67,23.62 66.64,23.59 66.64,18.05 66.64,17.94 v66.74,17.85
  Bottom 0.203: MK_REAR3.4 arc-90 66.15,23.62 v66.67,23.62 | P4.8 71,17.35 arc45 69.15,18.12 66.74,18.12 66.74,18.11 v66.74,17.85
DIN  (via drill 0.35)
  Top 0.203: P1.10 29.24,56.69 arc45 29.88,58.24 29.88,62.32 arc90 28.93,63.27 28.48,63.27 27.52,63.67 arc-45 27.47,63.69 v27.37,63.69
  Bottom 0.203: v27.37,63.69 27.25,63.57 arc-45 R15.2
DIN1  (via drill 0.35)
  Top 0.203: P2.10 71.92,56.95 arc45 72.56,58.49 72.56,62.57 arc90 71.6,63.52 71.15,63.52 70.19,63.93 arc-45 70.14,63.94 v70.04,63.94
  Bottom 0.203: v70.04,63.94 69.92,63.83 arc-45 R7.2
DIN2  (via drill 0.35)
  Top 0.203: P3.10 28.99,13.51 arc45 29.63,15.06 29.63,19.14 arc90 28.68,20.09 28.23,20.09 27.26,20.49 arc-45 27.22,20.51 v27.11,20.51
  Bottom 0.203: v27.11,20.51 27,20.39 arc-45 R11.2
DIN3  (via drill 0.35)
  Top 0.203: P4.10 71.66,13.77 arc45 72.3,15.31 72.3,19.39 arc90 71.35,20.34 70.9,20.34 69.93,20.75 arc-45 69.89,20.76 v69.79,20.76
  Bottom 0.203: v69.79,20.76 69.67,20.65 arc-45 R16.2
GND  (via drill 0.35, 0.45, 0.5, 0.6)
  Top 0.203: U2.1 13.86,65.42 13.64,65.2 arc45 13.46,64.77 13.46,64.19 arc45 13.83,63.3 14.66,62.47 arc90 15.99,62.47 arc90 15.99,63.99 U2.4 16.13,64.12 arc90 16.76,64.75 arc-45 16.89,65.06 17.41,65.58 18.01,65.58 VEML_F.3
  Top 0.508: C1.2 22.02,62.32 22.03,64.31 MK_REAR.P$1 | U2.1 14.11,68.91 20.17,68.91 C4.2
  Top 0.813: 26.2,54.09 25.66,54.62 23.87,54.77
  Top 1.016: NC5.2 26.2,54.09
  Bottom 0.203: C2.2 U1.4 15.87,64.91 16,64.77 U1.5
  Bottom 0.762: C2.2 17.86,70.21
  Bottom 0.813: 21.34,75.31 21.16,75.47 | P1.1 28.83,75.56 | C9.2 21.34,65.33 MK_REAR.P$1
  other vias: 23.11,48.39 24.64,48.77 26.04,49.15 9.53,70.36 10.41,69.72 9.4,69.22 28.07,76.33 33.2,71.75 33.91,70.71 37.47,63.25 37.47,61.98 37.28,60.73 22.45,71.63 25.16,71.8 23.72,71.69 14.48,70.23 14.48,71.37 14.48,72.64 23.94,69.09 22.35,69.34 18.6,59.9 21.34,75.18 21.34,76.45 21.31,77.7 28.53,50.64 29.62,50.97 32.61,60.46 32.58,61.8 33.89,61.82 17.85,68.89 23.87,54.74
  pour Top: 1.72,64.08 1.72,65.28 arc-90 21.24,84.8 22.25,84.8 arc-90 41.53,65.52 41.53,64.33 arc-90 22.11,44.91 20.88,44.91 arc-90
  pour Bottom: 22.11,84.58 20.68,84.58 arc90 1.7,65.6 1.7,64.1 arc90 21.07,44.73 21.56,44.73 arc90 41.62,64.79 41.62,65.07 arc90
  cutout Bottom: 11.05,69.34 11.05,60.58 19.43,60.58 19.43,69.34
GND1  (via drill 0.35, 0.45, 0.5, 0.6)
  Top 0.203: U4.1 56.53,65.67 56.31,65.46 arc45 56.13,65.02 56.13,64.44 arc45 56.5,63.55 57.33,62.73 arc90 58.66,62.73 arc90 58.66,64.24 U4.4 58.81,64.37 arc90 59.44,65 arc-45 59.57,65.32 60.09,65.84 60.68,65.84 VEML_F1.3
  Top 0.508: C5.2 64.69,62.58 64.7,64.56 MK_REAR1.P$1 | U4.1 56.78,69.17 62.84,69.17 C6.2
  Top 0.813: 68.87,54.34 68.34,54.88 66.54,55.02
  Top 1.016: NC15.2 68.87,54.34
  Bottom 0.203: C11.2 U3.4 58.54,65.16 58.67,65.02 U3.5
  Bottom 0.762: C11.2 60.53,70.46
  Bottom 0.813: 64.01,75.56 63.84,75.73 | P2.1 71.5,75.82 | C10.2 64.01,65.58 MK_REAR1.P$1
  other vias: 65.79,48.64 67.31,49.02 68.71,49.4 52.2,70.61 53.09,69.98 52.07,69.47 70.74,76.58 75.87,72.01 76.58,70.97 80.14,63.5 80.14,62.23 79.95,60.99 65.12,71.88 67.84,72.05 66.39,71.94 57.15,70.48 57.15,71.63 57.15,72.9 66.61,69.34 65.02,69.6 61.27,60.15 64.01,75.44 64.01,76.71 63.98,77.95 71.2,50.89 72.3,51.22 75.28,60.71 75.26,62.05 76.57,62.08 60.52,69.14 66.54,54.99
  pour Top: 44.39,64.33 44.39,65.53 arc-90 63.91,85.05 64.92,85.05 arc-90 84.2,65.77 84.2,64.58 arc-90 64.78,45.17 63.55,45.17 arc-90
  pour Bottom: 64.78,84.84 63.35,84.84 arc90 44.37,65.85 44.37,64.36 arc90 63.75,44.98 64.23,44.98 arc90 84.29,65.05 84.29,65.33 arc90
  cutout Bottom: 53.72,69.6 53.72,60.83 62.1,60.83 62.1,69.6
GND2  (via drill 0.35, 0.45, 0.5, 0.6)
  Top 0.203: U6.1 13.6,22.24 13.39,22.02 arc45 13.21,21.59 13.21,21.01 arc45 13.58,20.12 14.4,19.29 arc90 15.74,19.29 arc90 15.74,20.81 U6.4 15.88,20.94 arc90 16.51,21.57 arc-45 16.64,21.88 17.16,22.4 17.75,22.4 VEML_F2.3
  Top 0.508: C13.2 21.77,19.14 21.78,21.13 MK_REAR2.P$1 | U6.1 13.86,25.73 19.92,25.73 C14.2
  Top 0.813: 25.95,10.91 25.41,11.44 23.62,11.59
  Top 1.016: NC25.2 25.95,10.91
  Bottom 0.203: C17.2 15.62,22.53 U5.4 15.61,21.72 15.75,21.59 U5.5
  Bottom 0.762: C17.2 17.6,27.03
  Bottom 0.813: 21.08,32.13 20.91,32.29 | P3.1 28.57,32.38 | C16.2 21.08,22.15 MK_REAR2.P$1
  other vias: 22.86,5.21 24.38,5.59 25.78,5.97 9.27,27.18 10.16,26.54 9.14,26.03 27.81,33.15 32.94,28.57 33.66,27.53 37.21,20.07 37.21,18.8 37.03,17.55 22.19,28.45 24.91,28.62 23.46,28.51 14.22,27.05 14.22,28.19 14.22,29.46 23.69,25.91 22.1,26.16 18.35,16.72 21.08,32 21.08,33.27 21.06,34.52 28.28,7.46 29.37,7.79 32.36,17.28 32.33,18.62 33.64,18.64 17.59,25.71 23.61,11.56
  pour Top: 1.46,20.9 1.46,22.1 arc-90 20.98,41.62 21.99,41.62 arc-90 41.27,22.34 41.27,21.15 arc-90 21.86,1.73 20.62,1.73 arc-90
  pour Bottom: 21.85,41.4 20.43,41.4 arc90 1.45,22.42 1.45,20.92 arc90 20.82,1.55 21.3,1.55 arc90 41.36,21.61 41.36,21.89 arc90
  cutout Bottom: 10.79,26.16 10.79,17.4 19.18,17.4 19.18,26.16
GND3  (via drill 0.35, 0.45, 0.5, 0.6)
  Top 0.203: U8.1 56.28,22.49 56.06,22.28 arc45 55.88,21.84 55.88,21.26 arc45 56.25,20.37 57.07,19.55 arc90 58.41,19.55 arc90 58.41,21.06 U8.4 58.55,21.19 arc90 59.18,21.82 arc-45 59.31,22.14 59.83,22.66 60.43,22.66 VEML_F3.3
  Top 0.508: C19.2 64.44,19.4 64.45,21.38 MK_REAR3.P$1 | U8.1 56.53,25.99 62.59,25.99 C20.2
  Top 0.813: 68.62,11.16 68.08,11.7 66.29,11.84
  Top 1.016: NC35.2 68.62,11.16
  Bottom 0.203: C23.2 U7.4 58.28,21.98 58.42,21.84 U7.5
  Bottom 0.762: C23.2 60.27,27.28
  Bottom 0.813: 63.75,32.38 63.58,32.55 | P4.1 71.25,32.64 | C22.2 63.75,22.4 MK_REAR3.P$1
  other vias: 65.53,5.46 67.06,5.84 68.45,6.22 51.94,27.43 52.83,26.8 51.82,26.29 70.48,33.4 75.62,28.83 76.33,27.79 79.88,20.32 79.88,19.05 79.7,17.81 64.87,28.7 67.58,28.87 66.14,28.76 56.9,27.3 56.9,28.45 56.9,29.72 66.36,26.16 64.77,26.42 61.02,16.97 63.75,32.26 63.75,33.53 63.73,34.77 70.95,7.71 72.04,8.04 75.03,17.53 75,18.87 76.31,18.9 60.27,25.96 66.29,11.81
  pour Top: 44.13,21.15 44.13,22.35 arc-90 63.65,41.87 64.66,41.87 arc-90 83.94,22.59 83.94,21.4 arc-90 64.53,1.99 63.3,1.99 arc-90
  pour Bottom: 64.53,41.66 63.1,41.66 arc90 44.12,22.67 44.12,21.18 arc90 63.49,1.8 63.97,1.8 arc90 84.04,21.87 84.04,22.15 arc90
  cutout Bottom: 53.47,26.42 53.47,17.65 61.85,17.65 61.85,26.42
LRCLK  (via drill 0.3, 0.35)
  Top 0.203: v23.55,62.99 23.54,62.98 23.54,61.36 arc45 v24.23,59.72
  Bottom 0.203: MK_REAR.1 23.66,63.09 v23.55,62.99 | P1.9 28.83,58.76 27.88,59.72 arc90 v24.23,59.72
LRCLK1  (via drill 0.3, 0.35)
  Top 0.203: v66.22,63.24 66.22,63.23 66.22,61.62 arc45 v66.9,59.97
  Bottom 0.203: MK_REAR1.1 66.33,63.35 v66.22,63.24 | P2.9 71.5,59.02 70.55,59.97 arc90 v66.9,59.97
LRCLK2  (via drill 0.3, 0.35)
  Top 0.203: v23.3,19.81 23.29,19.8 23.29,18.18 arc45 v23.97,16.54
  Bottom 0.203: MK_REAR2.1 23.4,19.91 v23.3,19.81 | P3.9 28.57,15.58 27.62,16.54 arc90 v23.97,16.54
LRCLK3  (via drill 0.3, 0.35)
  Top 0.203: v65.97,20.06 v65.96,20.05 65.96,18.44 arc45 v66.64,16.79
  Bottom 0.203: MK_REAR3.1 66.08,20.17 v65.97,20.06 | P4.9 71.25,15.84 70.3,16.79 arc90 v66.64,16.79
N$1  (via drill 0.3)
  Top 0.203: R3.1 24.77,70.19 24.77,69.67 arc-90 21.52,66.42 C4.1 | 20.46,64.39 20.46,64.29 20.48,63.38 C1.1 | 20.46,64.39 20.46,65.98 20.76,66.27 C4.1 | VEML_F.2 20.46,64.39 | C4.1 20.57,66.42 19.62,67.37 arc45 18.18,67.96 v16.03,67.96 | v16.15,66.54 15.96,66.35 15.96,65.52 U2.6
  Bottom 0.203: v16.03,67.96 16.15,67.84 v16.15,66.54
N$2  (via drill 0.35)
  Top 0.203: v31.45,54.39 28.95,51.88 NEO_05.2-DOUT 28.35,52.53 arc85 25.85,55.34 23.12,55.56 23.07,55.62 JP1.1
  Bottom 0.203: NEO_06.4-DIN 35.94,61.99 33.85,59.9 arc45 32.13,55.76 32.15,55.74 32.15,55.43 arc-45 31.91,54.84 v31.45,54.39
N$3
  Top 0.203: NEO_11.2-DOUT 56.91,50.91 arc69 NEO_12.4-DIN
N$4
  Top 0.203: NEO_02.2-DOUT 19.13,80.65 arc73 NEO_03.4-DIN
N$5
  Bottom 0.203: NEO_09.2-DOUT 11.77,51.37 arc29 NEO_10.4-DIN
N$6  (via drill 0.3)
  Top 0.203: JP3.2 21.97,60.07 21.62,60.42 arc45 20.84,60.74 20.16,60.74 arc-90 19.44,61.45 19.44,62.48 19.44,62.51 19.44,62.65 arc-45 v19.71,63.29
  Bottom 0.203: MK_REAR.2 22.27,63.29 v19.71,63.29
N$7
  Bottom 0.203: NEO_07.2-DOUT 22.23,80.35 arc-26 11.89,75.46 NEO_08.4-DIN
N$8
  Top 0.203: NEO_04.2-DOUT 14.24,50.65 arc69 NEO_05.4-DIN
N$9
  Bottom 0.203: NEO_08.2-DOUT 6.9,69.8 arc-18 NEO_09.4-DIN
N$10
  Top 0.203: NEO_03.2-DOUT 8.2,68.46 arc-13 6.69,62.06 6.6,61.78 arc24 NEO_04.4-DIN
N$11
  Top 0.203: NEO_14.2-DOUT 61.8,80.91 arc73 NEO_15.4-DIN
N$12  (via drill 0.3)
  Top 0.203: R1.1 67.44,70.44 67.44,69.92 arc-90 64.2,66.68 C6.1 | 63.14,64.65 63.14,64.54 63.15,63.63 C5.1 | 63.14,64.65 63.14,66.23 63.43,66.53 C6.1 | VEML_F1.2 63.14,64.65 | C6.1 63.24,66.68 62.3,67.62 arc45 60.86,68.22 v58.7,68.22 | v58.83,66.8 58.64,66.61 58.64,65.78 U4.6
  Bottom 0.203: v58.7,68.22 58.83,68.09 v58.83,66.8
N$13
  Top 0.203: NEO_15.2-DOUT 50.87,68.71 arc-13 49.36,62.31 49.27,62.04 arc24 NEO_11.4-DIN
N$14
  Bottom 0.203: MK_REAR1.6 68.26,65.01 R7.1
N$15  (via drill 0.3)
  Top 0.203: JP5.2 64.65,60.32 64.3,60.67 arc45 63.51,61 62.83,61 arc-90 62.12,61.71 62.12,62.74 62.12,62.77 62.12,62.91 arc-45 v62.38,63.55
  Bottom 0.203: MK_REAR1.2 64.94,63.55 v62.38,63.55
N$16
  Bottom 0.203: NEO_16.2-DOUT 54.44,51.62 arc29 NEO_17.4-DIN
N$17
  Bottom 0.203: MK_REAR.6 25.59,64.75 R15.1
N$18
  Bottom 0.203: NEO_19.2-DOUT 64.91,80.61 arc-26 54.56,75.72 NEO_20.4-DIN
N$19
  Bottom 0.203: NEO_20.2-DOUT 49.57,70.05 arc-18 NEO_16.4-DIN
N$20  (via drill 0.35)
  Top 0.203: v74.12,54.64 71.62,52.13 NEO_12.2-DOUT 71.03,52.78 arc85 68.52,55.6 65.8,55.82 65.74,55.87 JP2.1
  Bottom 0.203: NEO_18.4-DIN 78.61,62.25 76.52,60.16 arc45 74.81,56.01 74.82,55.99 74.82,55.68 arc-45 74.58,55.1 v74.12,54.64
N$21
  Top 0.203: NEO_21.2-DOUT 13.99,7.47 arc69 NEO_22.4-DIN
N$22
  Top 0.203: NEO_24.2-DOUT 18.87,37.47 arc73 NEO_25.4-DIN
N$23  (via drill 0.3)
  Top 0.203: R8.1 24.51,27.01 24.51,26.49 arc-90 21.27,23.24 C14.1 | 20.21,21.21 20.21,21.11 20.23,20.2 C13.1 | 20.21,21.21 20.21,22.8 20.5,23.09 C14.1 | VEML_F2.2 20.21,21.21 | C14.1 20.31,23.24 19.37,24.19 arc45 17.93,24.78 v15.77,24.78 | v15.9,23.36 15.71,23.17 15.71,22.34 U6.6
  Bottom 0.203: v15.77,24.78 15.9,24.66 v15.9,23.36
N$24
  Top 0.203: NEO_25.2-DOUT 7.95,25.28 arc-13 6.44,18.88 6.34,18.6 arc24 NEO_21.4-DIN
N$25
  Bottom 0.203: MK_REAR2.6 25.33,21.57 R11.1
N$26  (via drill 0.3)
  Top 0.203: JP8.2 21.72,16.89 21.37,17.24 arc45 20.59,17.56 19.9,17.56 arc-90 19.19,18.27 19.19,19.3 19.19,19.33 19.19,19.47 arc-45 v19.45,20.11
  Bottom 0.203: MK_REAR2.2 22.02,20.11 v19.45,20.11
N$27
  Bottom 0.203: NEO_26.2-DOUT 11.51,8.19 arc29 NEO_27.4-DIN
N$28
  Bottom 0.203: NEO_29.2-DOUT 21.98,37.17 arc-26 11.63,32.28 NEO_30.4-DIN
N$29
  Bottom 0.203: NEO_30.2-DOUT 6.64,26.62 arc-18 NEO_26.4-DIN
N$30  (via drill 0.35)
  Top 0.203: v31.2,11.21 28.69,8.7 NEO_22.2-DOUT 28.1,9.35 arc85 25.59,12.16 22.87,12.38 22.82,12.44 JP7.1
  Bottom 0.203: NEO_28.4-DIN 35.69,18.81 33.6,16.72 arc45 31.88,12.58 31.9,12.56 31.9,12.25 arc-45 31.66,11.66 v31.2,11.21
N$31
  Top 0.203: NEO_31.2-DOUT 56.66,7.73 arc69 NEO_32.4-DIN
N$32
  Top 0.203: NEO_34.2-DOUT 61.54,37.73 arc73 NEO_35.4-DIN
N$33  (via drill 0.3)
  Top 0.203: R12.1 67.18,27.26 67.18,26.74 arc-90 63.94,23.5 C20.1 | 62.88,21.47 62.88,21.36 62.9,20.45 C19.1 | 62.88,21.47 62.88,23.05 63.18,23.35 C20.1 | VEML_F3.2 62.88,21.47 | C20.1 62.98,23.5 62.04,24.44 arc45 60.6,25.04 v58.44,25.04 | v58.57,23.62 58.38,23.43 58.38,22.6 U8.6
  Bottom 0.203: v58.44,25.04 58.57,24.91 v58.57,23.62
N$34
  Top 0.203: NEO_35.2-DOUT 50.62,25.53 arc-13 49.11,19.13 49.01,18.86 arc24 NEO_31.4-DIN
N$35
  Bottom 0.203: MK_REAR3.6 68,21.83 R16.1
N$36  (via drill 0.3)
  Top 0.203: JP11.2 64.39,17.14 64.04,17.49 arc45 63.26,17.82 62.57,17.82 arc-90 61.86,18.53 61.86,19.56 61.86,19.59 61.86,19.73 arc-45 v62.13,20.37
  Bottom 0.203: MK_REAR3.2 64.69,20.37 v62.13,20.37
N$37
  Bottom 0.203: NEO_36.2-DOUT 54.18,8.44 arc29 NEO_37.4-DIN
N$38
  Bottom 0.203: NEO_39.2-DOUT 64.65,37.43 arc-26 54.31,32.54 NEO_40.4-DIN
N$39
  Bottom 0.203: NEO_40.2-DOUT 49.31,26.87 arc-18 NEO_36.4-DIN
N$40  (via drill 0.35)
  Top 0.203: v73.87,11.46 71.36,8.95 NEO_32.2-DOUT 70.77,9.6 arc85 68.27,12.42 65.54,12.64 65.49,12.69 JP10.1
  Bottom 0.203: NEO_38.4-DIN 78.36,19.07 76.27,16.98 arc45 74.55,12.83 74.57,12.81 74.57,12.5 arc-45 74.33,11.92 v73.87,11.46
NEO_P1
  Top 0.203: NEO_01.2-DOUT 35.94,67.63 arc45 34.01,72.29 arc-28 29.88,79.16 NEO_02.4-DIN
NEO_P2
  Bottom 0.203: NEO_06.2-DOUT NEO_07.4-DIN
NEO_P3
  Top 0.203: NEO_13.2-DOUT 78.61,67.89 arc45 76.68,72.54 arc-28 72.55,79.41 NEO_14.4-DIN
NEO_P4
  Bottom 0.203: NEO_18.2-DOUT NEO_19.4-DIN
NEO_P5
  Top 0.203: NEO_23.2-DOUT 35.69,24.45 arc45 33.76,29.11 arc-28 29.62,35.98 NEO_24.4-DIN
NEO_P6
  Bottom 0.203: NEO_28.2-DOUT NEO_29.4-DIN
NEO_P7
  Top 0.203: NEO_33.2-DOUT 78.36,24.71 arc45 76.43,29.36 arc-28 72.3,36.23 NEO_34.4-DIN
NEO_P8
  Bottom 0.203: NEO_38.2-DOUT NEO_39.4-DIN
NEOP_IN  (via drill 0.35)
  Top 0.203: JP4.2 21.06,55.68 21.07,55.67 21.06,55.66 JP1.3 21.07,56.3 arc-31 21.21,56.56 arc-45 22.39,57.05 22.51,57.05 arc-45 23.73,56.54 arc45 v24.43,56.25 | NEO_01.4-DIN 38.58,61.66 arc45 38.22,60.79 arc-45 37.76,59.67 35.31,57.22 arc-45 34.74,56.99 arc45 33.84,56.61 33.01,55.78 arc45 32.62,54.85 arc-45 32.4,54.31 v30.07,51.98
  Bottom 0.203: v30.07,51.98 arc45 29.68,52.93 27.49,55.13 arc45 24.53,56.35 v24.43,56.25
NEOP_IN1  (via drill 0.35)
  Top 0.203: JP6.2 63.73,55.93 63.74,55.93 63.73,55.92 JP2.3 63.74,56.55 arc-31 63.89,56.81 arc-45 65.06,57.3 65.18,57.3 arc-45 66.4,56.8 arc45 v67.1,56.51 | NEO_13.4-DIN 81.25,61.92 arc45 80.89,61.05 arc-45 80.43,59.92 77.98,57.48 arc-45 77.41,57.24 arc45 76.51,56.87 75.68,56.04 arc45 75.29,55.1 arc-45 75.07,54.57 v72.74,52.24
  Bottom 0.203: v72.74,52.24 arc45 72.35,53.19 70.16,55.38 arc45 67.2,56.61 v67.1,56.51
NEOP_IN2  (via drill 0.35)
  Top 0.203: JP9.2 20.81,12.5 20.81,12.49 20.8,12.48 JP7.3 20.81,13.12 arc-31 20.96,13.38 arc-45 22.14,13.87 22.26,13.87 arc-45 23.47,13.36 arc45 v24.18,13.07 | NEO_23.4-DIN 38.33,18.48 arc45 37.97,17.61 arc-45 37.5,16.49 35.06,14.04 arc-45 34.49,13.81 arc45 33.59,13.43 32.76,12.6 arc45 32.37,11.67 arc-45 32.15,11.13 v29.82,8.8
  Bottom 0.203: v29.82,8.8 arc45 29.42,9.75 27.23,11.95 arc45 24.27,13.17 v24.18,13.07
NEOP_IN3  (via drill 0.35)
  Top 0.203: JP12.2 63.48,12.75 63.48,12.74 JP10.3 63.48,13.37 arc-31 63.63,13.63 arc-45 64.81,14.12 64.93,14.12 arc-45 66.14,13.62 arc45 v66.85,13.33 | NEO_33.4-DIN 81,18.74 arc45 80.64,17.87 arc-45 80.17,16.74 77.73,14.3 arc-45 77.16,14.06 arc45 76.26,13.69 75.43,12.86 arc45 75.04,11.92 arc-45 74.82,11.39 v72.49,9.06
  Bottom 0.203: v72.49,9.06 arc45 72.09,10.01 69.9,12.2 arc45 66.95,13.43 v66.85,13.33
NEOP_OUT  (via drill 0.35)
  Top 0.203: JP4.1 17.93,55.71 17.88,55.81 17.79,55.9 17.79,54.89 19.7,52.98 arc-45 21.82,47.88 v21.84,47.86
  Bottom 0.203: NEO_10.2-DOUT 29.41,48.78 | 29.41,48.78 29.25,48.59 28.59,48.59 27.76,47.76 arc-53 23.96,46.19 arc-45 22.73,46.7 21.84,47.6 v21.84,47.86 | 29.41,48.78 29.81,49.25 arc41 30.76,51.79 30.76,62.67 arc45 29.57,65.53 P1.5
NEOP_OUT1  (via drill 0.35)
  Top 0.203: JP6.1 60.6,55.96 60.55,56.07 60.46,56.16 60.46,55.15 62.38,53.23 arc-45 64.49,48.13 v64.51,48.12
  Bottom 0.203: NEO_17.2-DOUT 72.08,49.03 | 72.08,49.03 71.92,48.85 71.27,48.85 70.43,48.02 arc-53 66.64,46.44 arc-45 65.4,46.96 64.51,47.85 v64.51,48.12 | 72.08,49.03 72.48,49.5 arc41 73.43,52.04 73.43,62.92 arc45 72.25,65.79 P2.5
NEOP_OUT2  (via drill 0.35)
  Top 0.203: JP9.1 17.68,12.53 17.62,12.63 17.54,12.72 17.54,11.71 19.45,9.8 arc-45 21.56,4.7 v21.58,4.68
  Bottom 0.203: NEO_27.2-DOUT 29.16,5.6 | 29.16,5.6 28.99,5.41 28.34,5.41 27.51,4.58 arc-53 23.71,3.01 arc-45 22.47,3.52 21.58,4.42 v21.58,4.68 | 29.16,5.6 29.56,6.07 arc41 30.5,8.61 30.5,19.49 arc45 29.32,22.35 P3.5
NEOP_OUT3  (via drill 0.35)
  Top 0.203: JP12.1 60.35,12.78 60.3,12.89 60.21,12.98 60.21,11.97 62.12,10.05 arc-45 64.23,4.95 v64.25,4.94
  Bottom 0.203: NEO_37.2-DOUT 71.83,5.85 | 71.83,5.85 71.67,5.67 71.01,5.67 70.18,4.84 arc-53 66.38,3.26 arc-45 65.15,3.78 64.25,4.67 v64.25,4.94 | 71.83,5.85 72.23,6.32 arc41 73.18,8.86 73.18,19.74 arc45 71.99,22.61 P4.5
NIN  (via drill 0.35)
  Top 0.203: v31.45,55.48 arc-45 30.79,55.2 v29.98,55.2 | JP1.2 21.91,54.39 v21.94,54.36
  Bottom 0.203: P1.4 arc-45 31.18,62.61 31.18,56.15 arc45 v31.45,55.48 | v29.98,55.2 28.62,55.2 arc-45 27.56,55.64 arc45 24.17,57.04 23.81,57.04 arc45 22.59,56.53 arc45 21.94,54.97 v21.94,54.36
NIN1  (via drill 0.35)
  Top 0.203: v74.13,55.73 arc-45 73.46,55.46 v72.65,55.46 | JP2.2 64.59,54.64 v64.61,54.62
  Bottom 0.203: P2.4 arc-45 73.85,62.87 73.85,56.41 arc45 v74.13,55.73 | v72.65,55.46 71.29,55.46 arc-45 70.23,55.89 arc45 66.84,57.3 66.48,57.3 arc45 65.26,56.79 arc45 64.61,55.23 v64.61,54.62
NIN2  (via drill 0.35)
  Top 0.203: v31.2,12.3 arc-45 30.53,12.02 v29.73,12.02 | JP7.2 21.66,11.21 v21.68,11.18
  Bottom 0.203: P3.4 arc-45 30.92,19.43 30.92,12.97 arc45 v31.2,12.3 | v29.73,12.02 28.36,12.02 arc-45 27.31,12.46 arc45 23.91,13.86 23.56,13.86 arc45 22.33,13.35 arc45 21.68,11.79 v21.68,11.18
NIN3  (via drill 0.35)
  Top 0.203: v73.87,12.55 arc-45 73.2,12.28 v72.4,12.28 | JP10.2 64.33,11.46 v64.36,11.44
  Bottom 0.203: P4.4 arc-45 73.59,19.69 73.59,13.23 arc45 v73.87,12.55 | v72.4,12.28 71.03,12.28 arc-45 69.98,12.71 arc45 66.59,14.12 66.23,14.12 arc45 65,13.61 arc45 64.36,12.05 v64.36,11.44
SCL0  (via drill 0.3)
  Top 0.203: P1.7 27.17,62.28 R5.1 | VEML_F.1 17.09,62.13 v17.04,62.13 | U2.5 15.63,64.77 arc45 15.32,64.64 arc90 15.32,63.2 v15.52,63
  Bottom 0.203: U1.2 14.87,63.65 v15.52,63 arc45 16.14,62.38 16.94,62.05 17.02,62.13 v17.04,62.13 17.27,61.9 27.93,61.9 arc45 P1.7
SCL1  (via drill 0.3)
  Top 0.203: P2.7 69.84,62.53 R4.1 | VEML_F1.1 59.76,62.38 v59.72,62.38 | U4.5 58.3,65.02 arc45 57.99,64.89 arc90 57.99,63.46 v58.2,63.25
  Bottom 0.203: U3.2 57.54,63.91 v58.2,63.25 arc45 58.81,62.64 59.62,62.3 59.69,62.38 v59.72,62.38 59.94,62.16 70.6,62.16 arc45 P2.7
SCL2  (via drill 0.3)
  Top 0.203: P3.7 26.91,19.1 R10.1 | VEML_F2.1 16.84,18.95 v16.79,18.95 | U6.5 15.38,21.59 arc45 15.06,21.46 arc90 15.06,20.02 v15.27,19.82
  Bottom 0.203: U5.2 14.61,20.47 v15.27,19.82 arc45 15.88,19.2 16.69,18.87 16.77,18.95 v16.79,18.95 17.01,18.72 27.67,18.72 arc45 P3.7
SCL3  (via drill 0.3)
  Top 0.203: P4.7 69.59,19.35 R14.1 | VEML_F3.1 59.51,19.2 v59.46,19.2 | U8.5 58.05,21.84 arc45 57.74,21.71 arc90 57.74,20.28 v57.94,20.07
  Bottom 0.203: U7.2 57.28,20.73 v57.94,20.07 arc45 58.56,19.46 59.36,19.12 59.44,19.2 v59.46,19.2 59.69,18.98 70.34,18.98 arc45 P4.7
SDA0  (via drill 0.35)
  Top 0.203: P1.6 28.96,64.28 29.09,64.14 30.25,64.14 30.36,64.08 R6.1 | VEML_F.4 17.7,67.28 15.22,67.28 v15.04,67.1 15.05,67.08 15.05,65.71 arc-90 U2.2
  Bottom 0.203: v15.04,67.1 15.04,65.87 U1.3 14.81,65.69 arc90 13.82,64.71 arc90 17.08,61.46 27.94,61.46 arc-45 28.09,61.39 arc45 28.34,61.29 29.17,61.29 arc90 29.97,62.09 29.97,62.09 arc45 29.07,64.28 P1.6
SDA1  (via drill 0.35)
  Top 0.203: P2.6 71.63,64.53 71.77,64.39 72.92,64.39 73.03,64.33 R2.1 | VEML_F1.4 60.37,67.53 57.89,67.53 v57.71,67.35 57.73,67.34 57.73,65.97 arc-90 U4.2
  Bottom 0.203: v57.71,67.35 57.71,66.12 U3.3 57.48,65.95 arc90 56.5,64.97 arc90 59.75,61.71 70.61,61.71 arc-45 70.77,61.65 arc45 71.02,61.54 71.84,61.54 arc90 72.64,62.34 72.64,62.35 arc45 71.74,64.53 P2.6
SDA2  (via drill 0.35)
  Top 0.203: P3.6 28.7,21.1 28.84,20.96 30,20.96 30.11,20.89 R9.1 | VEML_F2.4 17.44,24.1 14.96,24.1 v14.79,23.92 14.8,23.9 14.8,22.53 arc-90 U6.2
  Bottom 0.203: v14.79,23.92 14.79,22.69 U5.3 14.55,22.51 arc90 13.57,21.53 arc90 16.82,18.28 27.69,18.28 arc-45 27.84,18.21 arc45 28.09,18.11 28.92,18.11 arc90 29.72,18.91 29.72,18.91 arc45 28.81,21.1 P3.6
SDA3  (via drill 0.35)
  Top 0.203: P4.6 71.37,21.35 71.51,21.21 72.67,21.21 72.78,21.15 R13.1 | VEML_F3.4 60.11,24.35 57.64,24.35 v57.46,24.17 57.47,24.16 57.47,22.79 arc-90 U8.2
  Bottom 0.203: v57.46,24.17 57.46,22.94 U7.3 57.22,22.77 arc90 56.24,21.79 arc90 59.5,18.53 70.36,18.53 arc-45 70.51,18.47 arc45 70.76,18.36 71.59,18.36 arc90 72.39,19.16 72.39,19.17 arc45 71.48,21.35 P4.6

## Text on the board
bPlace: ID# | ID# | ID# | ID#
tNames: /Users/nathan/Desktop/moth_01.bmp | /Users/nathan/Desktop/moth_01.bmp | L | L | R | R | channel | channel | F | R | F | R | NEOP | NEOP | /Users/nathan/Desktop/moth_01.bmp | /Users/nathan/Desktop/moth_01.bmp | L | L | R | R | channel | channel | F | R | F | R | NEOP | NEOP
bNames: GND | GND | 5v | 5v | 3.3v | 3.3v | NeoIn | NeoIn | NeoOut | NeoOut | Eye-Stock / Rev 1.3 | Eye-Stock / Rev 1.3 | SDA | SDA | SCL | SCL | BCLK | BCLK | LRCLK | LRCLK | DIN | DIN | GND | GND | 5v | 5v | 3.3v | 3.3v | NeoIn | NeoIn | NeoOut | NeoOut | Eye-Stock / Rev 1.3 | Eye-Stock / Rev 1.3 | SDA | SDA | SCL | SCL | BCLK | BCLK | LRCLK | LRCLK | DIN | DIN
tValues: NeoOut | NeoIn | NeoOut | NeoIn | NeoOut | NeoIn | NeoOut | NeoIn
_tNames: VEML_F | VEML_F